# EAGLE board BiodataModular_007_Brain (EAGLE 9.6.2)
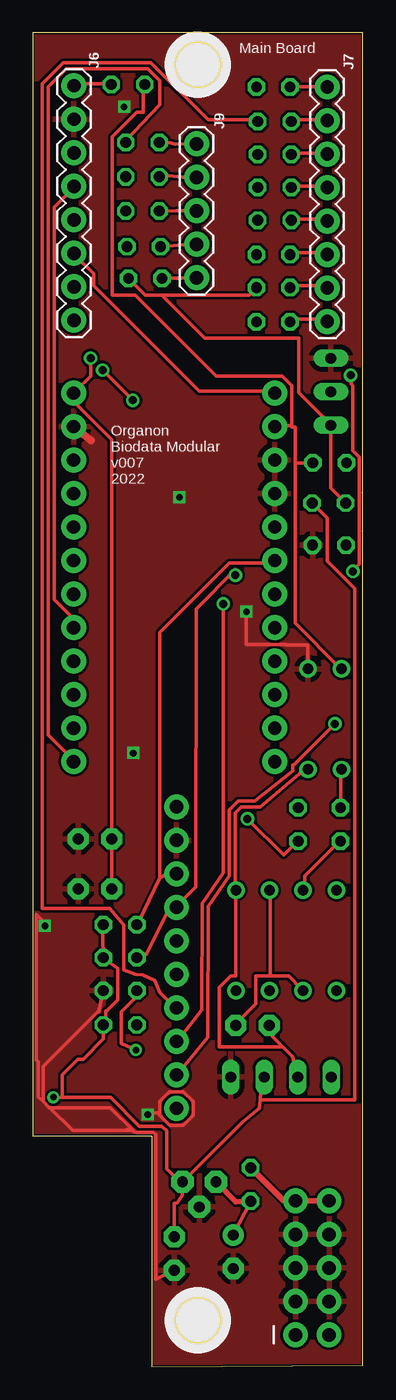
[diagram p0: board, top side]
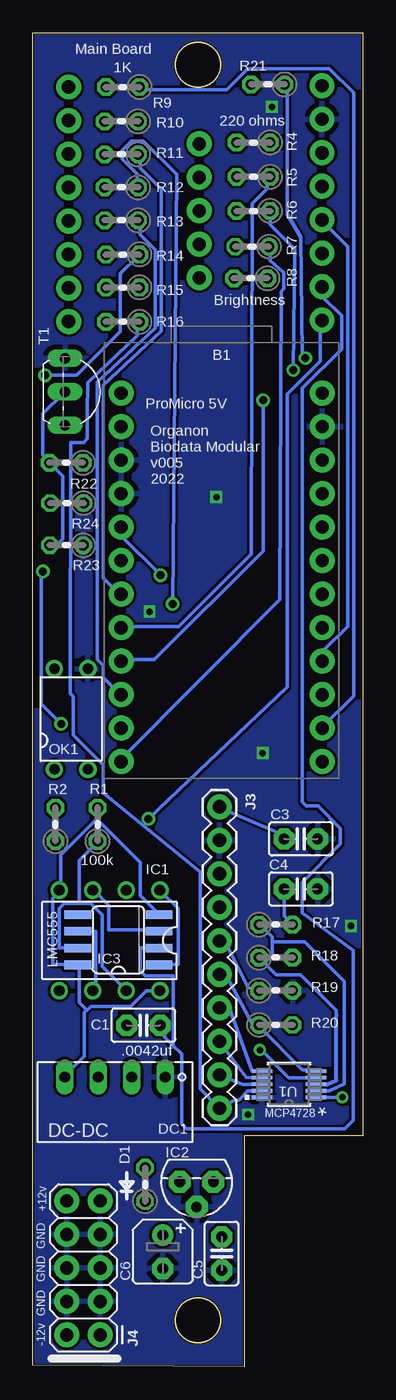
[diagram p1: board, bottom side, seen from below]

Size 25 x 101.1 mm. Coordinates in mm from the lower left corner, seen from the top.
Outline: 25,0.1 25,101.1 0,101.1 0,17.5 9,17.5 9,0 25,0.1
Outline: circle at 12.5,98.7 radius 1.7
Outline: circle at 12.5,3.5 radius 1.7
Copper layers (1*16): Top 0.035mm / dielectric 1.5mm / Bottom 0.035mm
Design rules "default *": minimum track width 10mil, minimum drill 24mil, track to track 8mil, track to pad 8mil, pad to pad 8mil, via to via 8mil, smd to smd 8mil, copper to edge 5mil, drill to drill 8mil, minimum pad ring 10mil, minimum via ring 8mil, stop-mask expansion 4mil, vias tented up to drill 0mil, thermal gap 15mil

## Footprints (pad centres in the part's own frame; a part is rotated, then mirrored left to right if it is on the bottom)
SPARKFUN_PRO_MICRO = drill 1.016 pad 1.88: 1 -7.62,12.7; 2 -7.62,10.16; 3 -7.62,7.62; 4 -7.62,5.08; 5 -7.62,2.54; 6 -7.62,0; 7 -7.62,-2.54; 8 -7.62,-5.08; 9 -7.62,-7.62; 10 -7.62,-10.16; 11 -7.62,-12.7; 12 -7.62,-15.24; 13 7.62,-15.24; 14 7.62,-12.7; 15 7.62,-10.16; 16 7.62,-7.62; 17 7.62,-5.08; 18 7.62,-2.54; 19 7.62,0; 20 7.62,2.54; 21 7.62,5.08; 22 7.62,7.62; 23 7.62,10.16; 24 7.62,12.7
C2.5-2 = drill 0.813 pad 1.6 octagon: 1 -1.27,0; 2 1.27,0
B45181A = drill 0.813 pad 1.6: + -1.27,0 | drill 0.813 pad 1.6 octagon: - 1.27,0
0204V = drill 0.813 octagon: 1 -1.27,0; 2 1.27,0
NME = drill 0.813 long: 1 0,3.81; 2 0,1.27; 3 0,-1.27; 4 0,-3.81
DIL08 = drill 0.813 pad 1.27: 1 -3.81,-3.81; 2 -1.27,-3.81; 3 1.27,-3.81; 4 3.81,-3.81; 5 3.81,3.81; 6 1.27,3.81; 7 -1.27,3.81; 8 -3.81,3.81
TO92 = drill 0.813 pad 1.676 octagon: 1 -1.27,0; 2 0,1.905; 3 1.27,0
SO08 = smd 0.66 x 2.032: 1 -1.905,-3.073; 2 -0.635,-3.073; 3 0.635,-3.073; 4 1.905,-3.073; 5 1.905,3.073; 6 0.635,3.073; 7 -0.635,3.073; 8 -1.905,3.073
1X10 = drill 1.016 pad 1.88: 1 0,0; 2 2.54,0; 3 5.08,0; 4 7.62,0; 5 10.16,0; 6 12.7,0; 7 15.24,0; 8 17.78,0; 9 20.32,0; 10 22.86,0
2X5 = drill 1.016 pad 1.88: 1 0,0; 2 0,2.54; 3 2.54,0; 4 2.54,2.54; 5 5.08,0; 6 5.08,2.54; 7 7.62,0; 8 7.62,2.54; 9 10.16,0; 10 10.16,2.54
1X08 = drill 1.016 pad 1.88: 1 0,0; 2 2.54,0; 3 5.08,0; 4 7.62,0; 5 10.16,0; 6 12.7,0; 7 15.24,0; 8 17.78,0
1X05 = drill 1.016 pad 1.88: 1 0,0; 2 2.54,0; 3 5.08,0; 4 7.62,0; 5 10.16,0
DIP4 = drill 0.8: 1 -1.27,-3.81; 2 1.27,-3.81; 3 1.27,3.81; 4 -1.27,3.81
TO92-EBC-OVAL = drill 0.813 long: B 0,-1.27; C 2.54,-1.27; E -2.54,-1.27
MSOP10_MC = smd 1.524 x 0.279: 1 -2.045,1; 2 -2.045,0.5; 3 -2.045,0; 4 -2.045,-0.5; 5 -2.045,-1; 6 2.045,-1; 7 2.045,-0.5; 8 2.045,0; 9 2.045,0.5; 10 2.045,1

## Placement (x,y rotation side)
B1  SPARKFUN_PRO_MICRO  [SPARKFUN_PRO_MICRO]  10.7,61.1 0 bottom
C1  .0042uf  [C2.5-2]  16.63,25.87 180 bottom
C3  0.1uF  [C2.5-2]  4.7,40 180 bottom
C4  10uF  [C2.5-2]  4.7,36.2 180 bottom
C5  0.01uF  [C2.5-2]  10.7,8.57 90 bottom
C6  100uF  [B45181A]  15.17,8.7 270 bottom
D1  1N4148  [0204V]  16.5,13.8 90 bottom
DC1  5v  [NME]  18.79,21.95 270 bottom
IC1  LMC555  [DIL08]  19.2,32.3 180 bottom
IC2  7805L  [TO92]  12.6,14 180 bottom
IC3  LM555D  [SO08]  18.53,32.36 90 bottom
J3  MCP4728  [1X10]  10.87,42.43 270 bottom
J4  Eurorack  [2X5]  19.9,2.4 90 bottom
J6  [1X08]  3.1,97.1 270 top
J7  [1X08]  22.3,97 270 top
J9  [1X05]  12.4,92.7 270 top
OK1  SFH618A  [DIP4]  22.11,49.08 0 bottom
R1  100k  [0204V]  20.1,41.1 90 bottom
R2  220  [0204V]  23.3,41.1 90 bottom
R4  220  [0204V]  8.3,92.8 180 bottom
R5  220  [0204V]  8.3,90.2 180 bottom
R6  220  [0204V]  8.3,87.6 180 bottom
R7  220  [0204V]  8.4,84.9 180 bottom
R8  220  [0204V]  8.5,82.5 180 bottom
R9  1K  [0204V]  18.2,97 180 bottom
R10  1K  [0204V]  18.3,94.4 180 bottom
R11  1K  [0204V]  18.3,91.9 180 bottom
R12  1K  [0204V]  18.3,89.4 180 bottom
R13  1K  [0204V]  18.3,86.9 180 bottom
R14  1K  [0204V]  18.2,84.3 180 bottom
R15  1K  [0204V]  18.2,81.8 180 bottom
R16  1K  [0204V]  18.2,79.2 180 bottom
R17  10k  [0204V]  6.6,33.5 0 bottom
R18  10k  [0204V]  6.6,31 0 bottom
R19  10k  [0204V]  6.6,28.5 0 bottom
R20  10k  [0204V]  6.6,25.9 0 bottom
R21  10k  [0204V]  7.2,97.2 180 bottom
R22  10k  [0204V]  22.48,68.52 180 bottom
R23  1M  [0204V]  22.46,62.27 180 bottom
R24  10k  [0204V]  22.43,65.46 180 bottom
T1  2N2222  [TO92-EBC-OVAL]  21.3,73.9 270 bottom
U1  MCP4728A0T-E/UN  [MSOP10_MC]  5.6,21.4 180 bottom

## Library data of the parts
B1 = SparkFun-Boards
C1 C3-C5 = capacitor-wima
C6 IC2 IC3 T1 = adafruit
D1 R1 R2 R4-R24 = rcl
DC1 = dc-dc-converter; MF: C & D TECHNOLOGIES, INC; MPN: NME1205D; OC_FARNELL: 1021466; OC_NEWARK: 98B8198
IC1 = linear
J3 = SparkFun-Connectors; PROD_ID: CONN-11563
J4 = SparkFun-Connectors; PROD_ID: CONN-08499; SF_ID: PRT-0778
J6 J7 = SparkFun-Connectors; PROD_ID: CONN-08438
J9 = SparkFun-Connectors
OK1 = optocoupler; MF: VISHAY/TELEFUNKEN; MPN: SFH618A-5; OC_FARNELL: 1469593; OC_NEWARK: 59K0259
U1 = MCP4728; MANUFACTURER_PART_NUMBER: MCP4728A0TEUN; VENDOR: Microchip

## Nets
5V: B1.24 C3.2 C4.2 C5.2 DC1.2 IC2.1 J3.1 J6.1 R17.2 R18.2 R20.2 R21.1 R24.1 U1.1
12V: C6.+ D1.1 IC2.3
A: J3.7 R10.1 U1.6
B: J3.8 R12.1 U1.7
BIO: B1.2 OK1.4 R21.2 R22.1
BIORAW: R8.1 R15.1 R24.2 T1.C
C: J3.9 R14.1 U1.8
CL: B1.6 J3.3 R17.1 U1.2
CVOUTA: J7.8 R16.2
D: J3.10 R16.1 U1.9
DA: B1.5 J3.4 R18.1 U1.3
GATE1: B1.14 R9.1
GATE1OUTA: J7.1 R9.2
GATE2: B1.7 R11.1
GATE2OUTA: J7.3 R11.2
GATE3: B1.10 R13.1
GATE3OUTA: J7.5 R13.2
GND: B1.3 B1.4 B1.23 C3.1 C4.1 C5.1 C6.- DC1.1 IC2.2 J3.2 J4.3 J4.4 J4.5 J4.6 J4.7 J4.8 J6.2 OK1.3 R19.2 R23.1 T1.E U1.10
IGND: C1.2 DC1.3 IC1.1 IC3.1 OK1.2
IV+: DC1.4 IC1.4 IC1.8 IC3.4 IC3.8 R1.2
L: J3.5 R19.1 U1.4
LED1: B1.13 R4.1
LED1BUSA: J9.1 R4.2
LED2: B1.8 R5.1
LED2BUSA: J9.2 R5.2
LED3: B1.9 R6.1
LED3BUSA: J9.3 R6.2
LED4: B1.12 R7.1
LED4BUSA: J9.4 R7.2
LED5BUSA: J9.5 R8.2
MIDITIP: B1.1 J6.6
N$1: IC1.3 IC3.3 R2.1
N$7: D1.2 J4.9 J4.10
N$8: R22.2 R23.2 T1.B
NOTE1OUTA: J7.2 R10.2
NOTE2OUTA: J7.4 R12.2
NOTE3OUTA: J7.6 R14.2
POT: B1.17 J6.4
PROBE1: C1.1 IC1.2 IC1.6 IC3.2 IC3.6 J6.7
PROBE2: IC1.7 IC3.7 J6.8 R1.1
PULSE: OK1.1 R2.2
R: J3.6 R20.1 U1.5
RAWOUTA: J7.7 R15.2
SWITCH: B1.16 J6.5
VCC: B1.21

## Tracks (layer width: path | path; a pad name or v marks a point on that pad's centre or on a via)
5V  (via drill 0.5, 0.61)
  Top 0.254: 17.22,20.23 17.16,19.57 15.9,18.54 11.66,14.29 IC2.1 11.33,13.8 | 17.22,20.23 17.26,20.85 17.46,21.05 DC1.2 | 11.33,13.8 10.13,15 10.13,17.87 9.77,18.23 8.07,18.23 5.89,20.41 2.2,20.41 | 11.33,13.8 11.33,12.98 10.95,12.41 10.7,12.38 C5.2 | R21.1 5.73,97.25 3.22,97.25 J6.1 | R17.2 5.3,32.88 5.3,32.59 R18.2 5.52,30.81 6.41,30.17 6.41,27.79 5.58,26.95 5.51,26.95 5.51,25.93 R20.2 5.33,24.83 3.8,23.3 3.4,23.3 2.2,22.1 2.2,20.41 | C4.2 5.96,36.22 5.96,39.88 C3.2 5.96,40.11 5.96,70.28 3.22,73.02 3.22,73.71 B1.24 3.22,73.94 4.36,75.08 v4.36,76.45 | 17.22,20.23 17.25,20.23 24.38,20.23 24.38,58.97 22.3,61.05 22.3,64.32 R24.1 | 1.4,20.41 v1.55,20.41 2.2,20.41
  Bottom 0.254: C4.2 5.96,35.99 5.96,34.16 5.51,33.7 R17.2 | J3.1 10.73,42.29 6.65,40.56 6.19,40.11 C3.2 | v4.36,76.45 4.59,76.68 4.69,85.62 5.73,87.37 5.73,97.03 R21.1 | v1.55,20.41 3.55,20.39 U1.1
12V
  Top 0.254: D1.1 C6.+
  Top 0.406: D1.1 15.38,12.49 IC2.3
A
  Top 0.254: R10.1 16.86,94.51 13.28,94.51 8.93,98.85 2.3,98.85 0.7,97.25 0.7,40.56 0.72,34.75 5.82,34.73 6.88,33.48 6.89,30.07 7.79,29.74 8.31,29.69 9.23,29.29 9.59,28.35 10.73,27.21 J3.7
  Bottom 0.254: U1.6 8.37,22.38 10.12,27.18 J3.7
B  (via drill 0.61)
  Top 0.254: v14.42,57.82 14.42,37.41 12.82,35.09 12.79,27.02 10.96,24.69 J3.8
  Bottom 0.254: v14.42,57.82 14.12,90.4 16.63,92.91 17.55,92.91 18.23,92.23 18.23,91.54 17.09,90.4 17.09,89.48 R12.1 | U1.7 8.84,21.92 J3.8
BIO
  Top 0.254: 23.34,52.91 OK1.4 23.25,52.98 19.88,56.35 19.88,68.47 | 19.88,68.47 21.34,68.47 R22.1 | 19.62,71.35 19.62,74.35 18.88,75.1 13.88,75.1 7.75,81.22 6,81.22 6,93.22 7.88,95.1 8.38,95.1 8.38,97.2 R21.2 | 19.62,71.35 18.38,71.35 B1.2 | 19.88,68.47 19.88,71.22 19.62,71.22 19.62,71.35
BIORAW
  Top 0.254: 9.88,81.22 16.38,81.22 16.88,81.72 R15.1 | 9.88,81.22 8.5,81.22 7.25,82.47 R8.1 | 9.88,81.22 9.88,81.1 13,77.97 20.12,77.97 20.12,73.85 22.5,71.47 T1.C 22.57,66.59 R24.2
C  (via drill 0.61)
  Top 0.254: J3.9 10.96,22.18 13.25,24.96 13.28,34.87 14.88,37.18 14.88,42.2 15.56,42.89 16.81,42.89 19.68,45.16 19.68,45.59 19.75,45.6 v22.88,48.73 | v24.08,75.16 24.12,74.47 24.25,74.35 24.25,69.42 24.74,68.93 24.74,66.28 | v24.25,60.28 24.2,60.28 24.74,60.82 24.74,63.36 | 24.74,66.28 24.75,66.27 | 24.74,66.28 24.74,63.36 | 24.75,63.35 24.74,63.36
  Bottom 0.254: U1.8 9.14,21.41 J3.9 | v24.08,75.16 21.67,75.14 18.38,78.47 18.38,82.85 17,84.22 R14.1 | v24.25,60.28 24.38,60.16 24.38,50.23 v22.88,48.73
CL
  Top 0.254: 9.59,37.03 8.02,33.7 R17.1 | 9.59,37.03 9.94,37.21 10.73,37.26 J3.3 | 9.59,37.03 9.62,55.65 14.88,60.91 18.31,60.91 B1.6
  Bottom 0.254: 6.88,32.1 6.88,32.56 7.79,33.48 R17.1 | 6.88,32.1 6.88,30.96 | U1.2 3.45,20.9 2.53,20.9 1.41,21.43 1.41,29.21 4.4,32.2 6.78,32.2 6.88,32.1
CVOUTA
  Top 0.254: R16.2 19.61,79.42 22.19,79.42 J7.8
D
  Bottom 0.254: U1.9 7.79,20.9 8.7,20.9 9.35,20.21 9.76,20.17 10.73,19.66 J3.10 10.96,19.66 12.33,21.03 12.33,37.49 19.68,43.48 19.68,45.59 21.96,47.88 21.96,50.8 22.17,51.01 22.13,70.04 21.17,70.04 20.87,70.34 20.87,72.29 20.86,74.58 17.09,78.14 17.09,79.2 R16.1
DA  (via drill 0.61)
  Top 0.254: R18.1 8.02,31.19 8.57,31.23 10.37,34.79 J3.4 10.96,34.98 12.33,36.35 12.36,57.44 15.34,60.41 v15.34,59.99
  Bottom 0.254: v15.34,59.99 18.31,62.97 18.31,63.42 B1.5 | 2,26.6 2,27 4.7,29.7 6.57,29.7 R18.1
  Bottom 0.305: U1.3 2.7,21.4 2,21.7 2,26.6
GATE1
  Bottom 0.254: R9.1 16.86,96.8 10.31,96.8 8.7,98.4 2.53,98.4 0.7,96.57 0.7,50.85 2.99,48.56 B1.14
GATE1OUTA
  Top 0.254: R9.2 19.61,97.03 22.19,97.03 J7.1
GATE2
  Bottom 0.254: R11.1 16.86,91.77 16.86,90.85 15.26,89.25 15.26,78.51 19.68,74.39 19.68,59.77 18.53,58.62 B1.7
GATE2OUTA
  Top 0.254: R11.2 19.61,92 22.19,92 J7.3
GATE3
  Bottom 0.254: R13.1 16.86,86.74 16.86,85.82 15.72,84.68 15.72,78.74 20.13,74.62 20.13,53.59 19.68,53.13 19.68,52.22 18.53,51.08 B1.10
GATE3OUTA
  Top 0.254: R13.2 19.61,86.97 22.19,86.97 J7.5
GND  (via drill 0.5)
  Top 0.254: OK1.3 20.84,54.7 19.2,54.7 19.2,54.73 16.17,54.73 v16.17,57.23 | v8.7,19.1 8.83,19.23 9.6,19.23 9.6,20.1 10.34,20.84 11.4,20.84 12.14,20.1 12.14,19.04 11.4,18.3 10.35,18.3 9.57,19.08 9.57,19.27 | R19.2 4.98,26.89 4.92,26.89 0.77,22.74 0.77,20.09 | 1.27,19.63 1.23,19.63 0.77,20.09 | 1.27,19.63 3,17.9 7.4,17.9 | 7.4,17.9 7.52,17.9 | 7.52,17.9 7.58,17.9 5.85,19.63 1.27,19.63 | 7.52,17.9 7.47,17.95 | 0.85,33.39 0.85,33.67 0.26,34.26 0.26,23.24 0.4,23.11 0.4,20.46 0.77,20.09 | 7.4,17.9 7.79,17.77 9.13,17.77 9.3,17.6 9.3,6.6 C5.1 | 7.1,18 7.4,17.9
  Top 0.61: B1.23 4.4,70.2
  Bottom 0.254: v16.17,57.23 16.17,57.42 16.06,57.42
  other vias: 7.6,46.5 6.9,95.5 0.9,33.4 11.1,65.9
  pour Top: 0,0.1 25,0.1 25,101 0.1,101 0.1,0.3
  pour Bottom: 25,0 25,101.1 0,101.1 0,0
IGND
  Top 0.254: 18.92,24.22 18.16,24.98 C1.2 | 18.92,24.22 19.68,23.46 19.99,22.02 DC1.3 | OK1.2 20.82,45.13 20.44,45.13 17.23,42.43 15.79,42.43 15.34,41.98 15.34,36.26 IC1.1 15.38,36.1 15.38,29.6 15,29.6 14.12,28.73 14.12,24.21 18.25,24.21 18.92,24.22
  Bottom 0.254: IC3.1 15.38,30.48 14,30.48 14,34.73 15.38,36.1 IC1.1
IV+
  Bottom 0.254: 20.15,41.5 20.13,41.52 20.13,42.2 R1.2 | 20.15,41.5 22.88,38.78 22.88,36.26 IC1.4 | 20.92,27.01 20.6,27.3 17.6,27.3 16.41,28.49 15.56,28.49 IC1.8 | 20.92,27.01 21.06,26.88 21.1,26.83 21.11,23.5 22.52,22.17 DC1.4 | 22.88,36.03 IC1.4 | 20.92,27.01 21,27.1 21.5,27.6 21.5,30.35 IC3.8 21.62,30.48 23.5,30.48 23.5,35.48 23,35.98 IC1.4 | 20.15,41.5 16.88,38.23 16.88,35.73 15.5,34.35 IC3.4
L  (via drill 0.5)
  Top 0.254: R19.1 7.87,28.07 6.7,26.9 6.7,24.5 v7.8,24
  Bottom 0.254: R19.1 8.02,28.68 8.67,28.71 10.47,32.26 J3.5 | v7.8,24 7.7,24 5.6,21.9 U1.4
LED1
  Top 0.254: R4.1 7.33,93.28 7.63,93.57 9.62,95.66 9.62,97.48 8.7,98.4 2.53,98.4 1.16,97.03 1.16,47.88 2.99,46.05 B1.13
LED1BUSA
  Top 0.254: R4.2 10.35,92.78 10.76,92.68 J9.1
LED2
  Bottom 0.254: R5.1 7.23,90.14 7.23,89.3 8.38,88.15 8.48,61.59 13.96,56.11 18.31,56.11 B1.8
LED2BUSA
  Top 0.254: R5.2 10.25,90.27 11.36,90.17 J9.2
LED3  (via drill 0.61)
  Top 0.254: v7.56,73.25 v5.28,75.54
  Bottom 0.254: v5.28,75.54 5.18,84.72 7.01,86.55 7.01,87.4 R6.1 | v7.56,73.25 7.56,61.82 15.79,53.59 18.31,53.59 B1.9
LED3BUSA
  Top 0.254: R6.2 10.85,87.62 11.76,87.62 J9.3
LED4
  Bottom 0.254: R7.1 7.01,84.88 7.01,83.84 5.99,82.92 5.99,81.71 6.2,81.5 6.29,58.16 18.31,46.05 B1.12
LED4BUSA
  Top 0.254: R7.2 9.95,84.91 10.96,85.01 J9.4
LED5BUSA
  Top 0.254: R8.2 10.68,82.5 11.26,82.5 J9.5
MIDITIP
  Top 0.254: B1.1 18.31,73.94 12.59,73.94 4.59,81.94 4.59,82.85 3.22,84.22 J6.6
N$1
  Top 0.254: IC1.3 20.59,36.26 20.59,37.18 23.11,39.69 R2.1
  Bottom 0.254: IC3.3 15.5,33.1 19.25,33.1 19.25,34.98 20.38,36.1 IC1.3
N$7
  Top 0.406: D1.2 19.01,12.56 J4.9 J4.10
N$8
  Bottom 0.254: T1.B 22.62,73.85 24.25,72.22 24.25,69.1 23.88,68.73 R22.2 22.74,67.51 22.74,62.74 23.21,62.27 R23.2
NOTE1OUTA
  Top 0.254: R10.2 19.61,94.51 22.19,94.51 J7.2
NOTE2OUTA
  Top 0.254: R12.2 19.61,89.48 22.19,89.48 J7.4
NOTE3OUTA
  Top 0.254: R14.2 19.61,84.45 22.19,84.45 J7.6
POT
  Top 0.254: B1.17 2.99,56.11 2.99,56.79 1.62,58.16 1.62,87.88 2.99,89.25 J6.4
PROBE1
  Top 0.254: 18,29.6 18,36.1 IC1.2 | 18,29.6 19.38,29.6 20.38,28.6 IC1.6 | 18,29.6 16.88,29.6 16.88,27.48 15.37,25.96 C1.1
  Bottom 0.254: 14.45,24.4 14.96,24.92 C1.1 | 14.45,24.4 13.73,23.69 13.73,18.41 13.36,18.03 1.37,18.03 0.75,18.65 0.75,31.55 4.59,34.39 4.59,36.71 1.7,39.6 1.7,40.8 3.4,42.5 4.3,42.5 4.6,42.8 4.59,74.17 1.62,77.14 1.62,79.65 2.99,81.02 2.99,81.71 J6.7 | IC3.2 16.88,31.73 16.88,29.98 16.5,29.6 14.38,29.6 14.38,24.48 14.45,24.4 | IC3.6 21.5,32.98 20.25,32.98 20.25,28.73 20.38,28.6 IC1.6
PROBE2  (via drill 0.61)
  Top 0.254: R1.1 19.91,39.69 18.99,38.78 v16.25,41.52
  Bottom 0.254: v16.25,41.52 5.73,51.54 5.73,73.71 3.22,76.22 3.22,79.2 J6.8 | IC3.7 23,31.73 23,34.73 22.62,35.1 21.5,35.1 | 21.5,35.1 21.5,38.35 20.12,39.73 R1.1 | 21.5,35.1 20.62,35.1 19.75,34.23 19.75,30.35 18,28.6 IC1.7
PULSE
  Top 0.254: OK1.1 23.34,45.13 23.34,42.43 R2.2
R
  Bottom 0.254: U1.5 3.68,22.5 4.59,22.5 7.79,25.7 R20.1 8.34,25.88 10.37,29.67 10.73,29.72 J3.6
RAWOUTA
  Top 0.254: R15.2 19.61,81.94 22.19,81.94 J7.7
SWITCH
  Bottom 0.254: B1.16 2.99,53.59 2.99,54.28 1.16,56.11 1.16,84.91 2.99,86.74 J6.5

## Text on the board
tNames: Main Board | Organon / Biodata Modular / v007 / 2022
bNames: Main Board | 1K | 220 ohms | Brightness | ProMicro 5V | Organon / Biodata Modular / v005 / 2022 | MCP4728 | +12v | GND | GND | GND | -12v
bValues: 220 | 10k | 10k | 10k | 10k